# Altium PCB Sound&Light IC evaluation board.PcbDoc
Units mm, origin at the board's own origin, x right, y up, seen from the top; angles counter-clockwise.
Board outline 33.4 x 32.51 mm, 2 copper layers (Top Layer, Bottom Layer); 16 components, 25 nets, 74 pads, 9 vias.
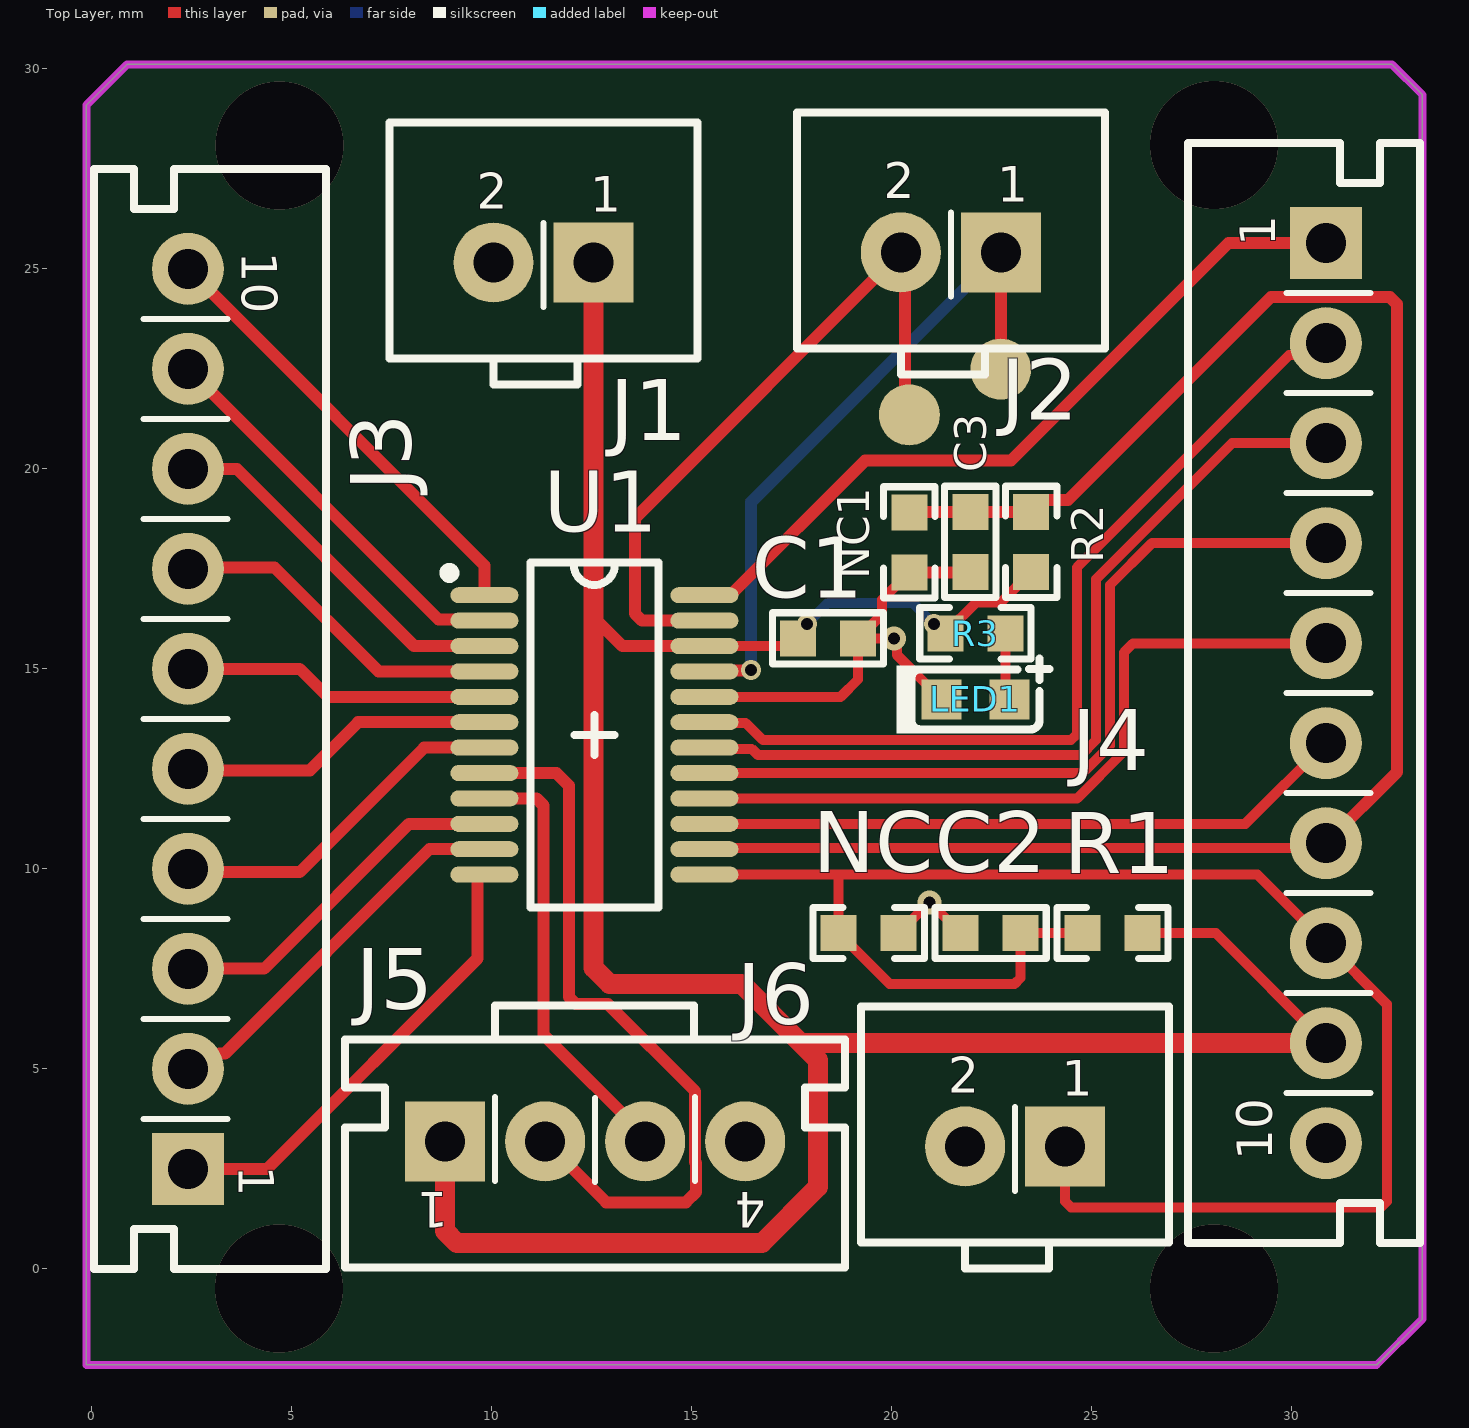
[diagram p0: Top Layer view]
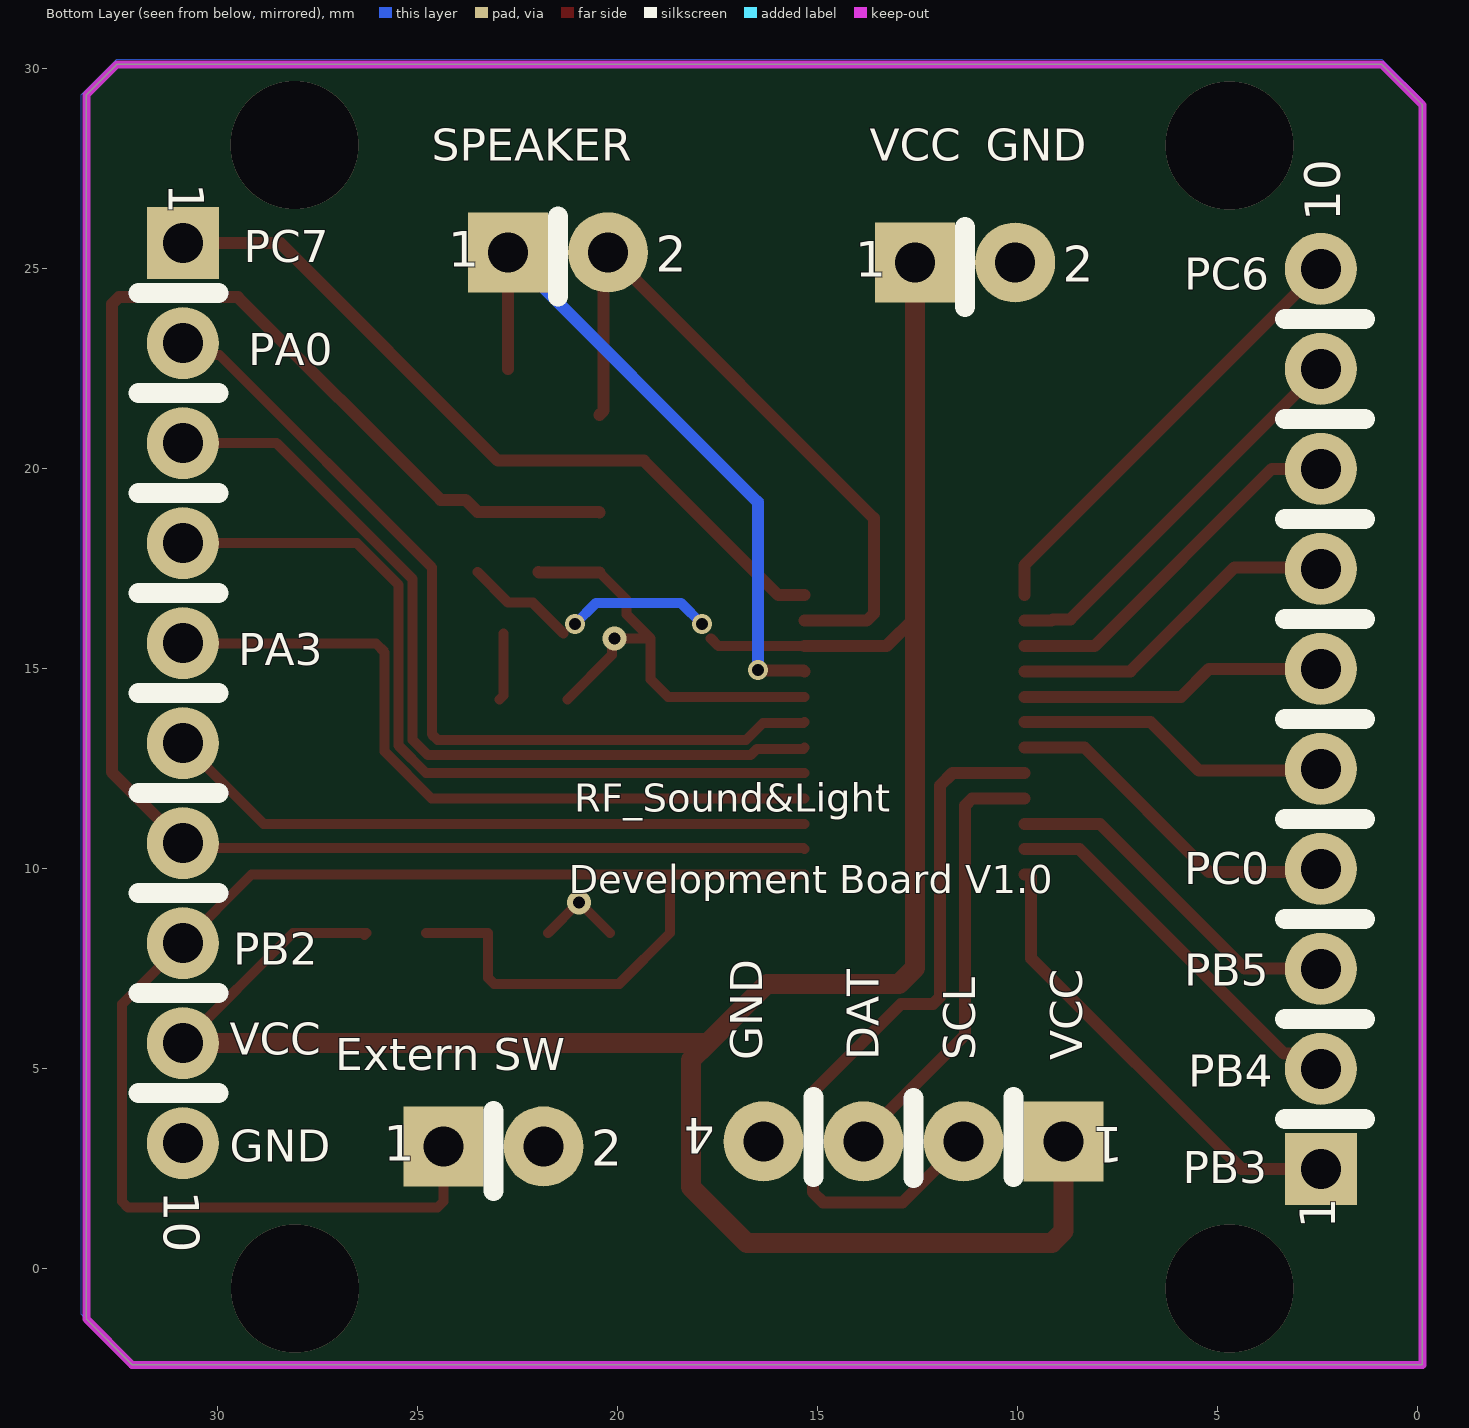
[diagram p1: Bottom Layer view, seen from below]
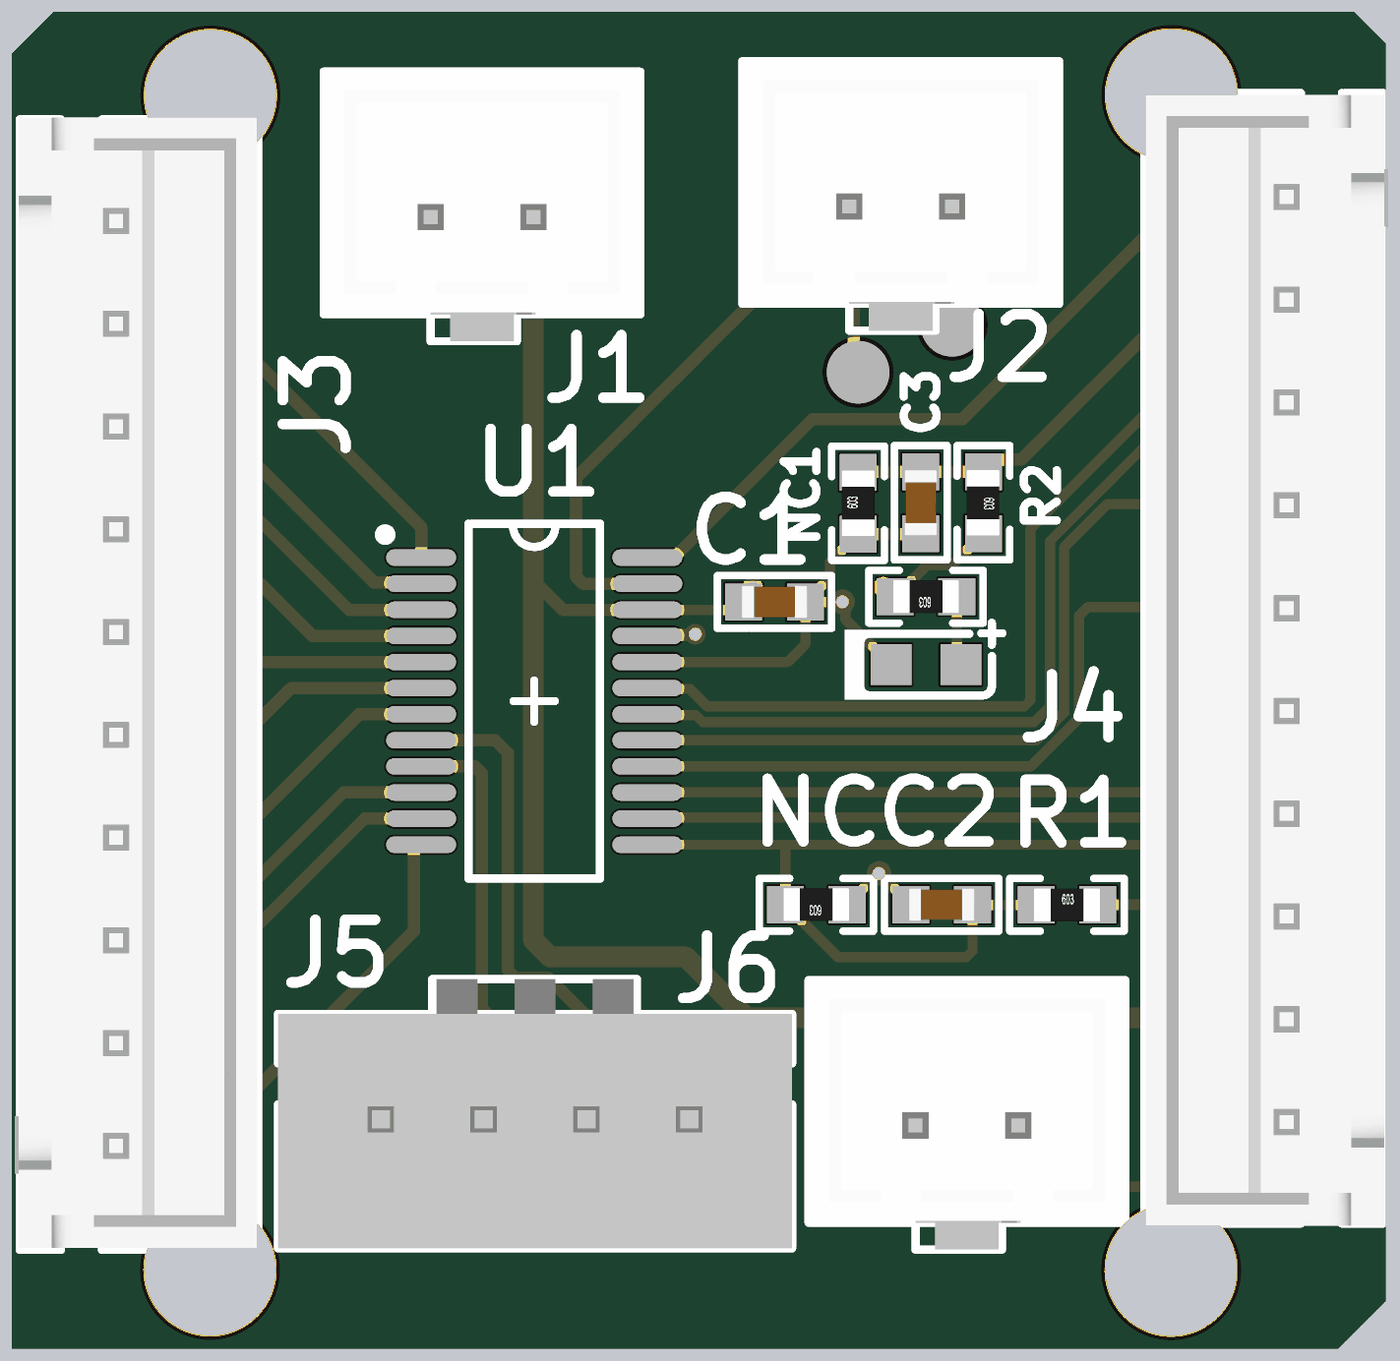
[diagram p2: 3D render of the assembled board from above, using the file's embedded part models]

## Layer stack, top to bottom
Top Solder: solder mask 0.0102, Solder Resist, Dk 3.5
Top Layer: signal copper 0.0356
Dielectric 1: dielectric 0.32, FR-4, Dk 4.8
Bottom Layer: signal copper 0.0356
Bottom Solder: solder mask 0.0102, Solder Resist, Dk 3.5

## Board outline
-0.127,-2.413 32.131,-2.413 33.274,-1.27 33.274,29.337 32.512,30.099 0.889,30.099 -0.127,29.083

## Design rules (kind name [scope] priority, off if disabled: settings)
Clearance [All] p1: gap=0.1 ignorepadtopadclearanceinfootprint=FALSE
PolygonConnect [All] p1: connectstyle=Direct reliefconductorwidth=0.254 reliefentries=4 polygonreliefangle="90 Angle" airgapwidth=0.254
RoutingVias [All] p1: holewidth=0.711 width=1.27 viastyle="Through Hole" minholewidth=0.711 minwidth=1.27 maxholewidth=0.711 maxwidth=1.27
SolderMaskExpansion [All] p1: expansion=0.102 istentingtop=FALSE
Width [All] p1: maxlimit=1 minlimit=0.1 preferedwidth=0.254
30 further rules are at their usual default settings.

## Components (designator, comment, footprint, x,y, rotation, side; value= is the part's Value field where it differs from the comment)
C1 "T542021036508" CAPC0603-RW 18.415,15.748 r180 top value=104
C2 "T542021036508" CAPC0603-RW 22.479,8.382 r0 top value=0.1u
C3 "T542021036508" CAPC0603-RW 21.971,18.161 r90 top value=0.1u
J1 "T690300125300" "CONN 2P PH=2.5mm HAA250A-2 WHITE" 11.303,25.146 r0 top value=2.5mm
J2 "T690300125300" "CONN 2P PH=2.5mm HAA250A-2 WHITE" 21.483,25.4 r0 top value=2.5mm
J3 "T690300105400" "CONN 10P PH=2.5mm ST CI2210P1VK0-NH" 2.413,13.736 r270 top value=2.5mm
J4 "T690300105400" "CONN 10P PH=2.5mm ST CI2210P1VK0-NH" 30.861,14.378 r90 top value=2.5mm
J5 "T690300127400" "CONN 4P PH=2.5mm XHB-4A-KL" 12.593,3.175 r180 top value=2.5mm
J6 "T690300125300" "CONN 2P PH=2.5mm HAA250A-2 WHITE" 23.094,3.048 r0 top value=2.5mm
LED1 "T575011480204" LED0603_BLUE 22.098,14.224 r0 top
NC "T502294202399" 0603-RW 19.431,8.382 r180 top value=9.1K
NC1 "T502294202399" 0603-RW 20.447,18.149 r90 top value=9.1K
R1 "T502294202399" 0603-RW 25.527,8.382 r0 top value=9.1K
R2 "T502294202399" 0603-RW 23.495,18.161 r270 top value=9.1K
R3 "T502294202399" 0603-RW 22.098,15.875 r180 top value=9.1K
U1 "BS86C08C 24SSOP" SSOP24(150mil) 12.573,13.335 r270 top

## Footprints (in the part's own frame and the unit in brackets; to place one, negate y for a bottom-side part, rotate by r counter-clockwise, add the part's x,y. Pads: shape width x height; smd on the part's side, far side on the other; paste and mask are expansions set on the pad)
0603-RW [mm]
  rect 0.9x0.9 smd mask+0.05: 1(-0.75,0) 2(0.75,0)
  silkscreen extent -1.39,-0.64 1.39,0.64, body extent -0.8,-0.41 0.8,0.39, height 0.3
CAPC0603-RW [mm] "Body size:  L1.6XW0.8XT0.8mm"
  rect 0.9x0.9 smd mask+0.05: 1(-0.75,0) 2(0.75,0)
  silkscreen extent -1.39,-0.64 1.39,0.64, body extent -0.8,-0.4 0.8,0.4, height 0.8
"CONN 2P PH=2.5mm HAA250A-2 WHITE" [mm] "CONN 2P PH=2.5mm HAA250A-2 WHITE"
  rect 2x2 hole 1: 1(1.25,0)
  round 2 hole 1: 2(-1.25,0)
  silkscreen extent -3.85,-3.05 3.85,3.5, body extent -3.75,-3.05 3.75,3.5, height 7.4
"CONN 4P PH=2.5mm XHB-4A-KL" [mm] "CONN 4P PH=2.5mm XHB-4A-KL H7.2mm"
  rect 2x2 hole 1: 1(3.75,0)
  round 2 hole 1: 2(1.25,0) 3(-1.25,0) 4(-3.75,0)
  silkscreen extent -6.25,-3.4 6.25,3.15, body extent -6.25,-3.4 6.25,3.15, height 7.2
"CONN 10P PH=2.5mm ST CI2210P1VK0-NH" [mm] "CONN 10P PH=2.5mm CI2210P1VK0-NH H7mm"
  rect 1.8x1.8 hole 1: 1(11.25,0)
  round 1.8 hole 1: 2(8.75,0) 3(6.25,0) 4(3.75,0) 5(1.25,0) 6(-1.25,0) 7(-3.75,0) 8(-6.25,0) 9(-8.75,0) 10(-11.25,0)
  silkscreen extent -13.75,-2.35 13.75,3.45, body extent -13.8,-2.47 13.7,3.43, height 7
LED0603_BLUE [mm] "1.6mmx0.8mm SMT LED, 0.45mm max. thickness"
  rect 1x1 smd paste+0 mask+0.05: 1(0.85,0) 2(-0.85,0)
  silkscreen extent -1.97,-0.85 1.85,1.02, body extent -0.8,-0.4 0.8,0.4, height 0.45
SSOP24(150mil) [mm] "SSOP-B(P=0.635mm) 24P"
  oval 0.4x1.7 smd mask+0.05: 1(-3.492,-2.75) 2(-2.857,-2.75) 3(-2.222,-2.75) 4(-1.587,-2.75) 5(-0.952,-2.75) 6(-0.317,-2.75) 7(0.318,-2.75) 8(0.953,-2.75) 9(1.588,-2.75) 10(2.223,-2.75) 11(2.858,-2.75) 12(3.493,-2.75) 13(3.492,2.75) 14(2.857,2.75) 15(2.222,2.75) 16(1.587,2.75) 17(0.952,2.75) 18(0.317,2.75) 19(-0.318,2.75) 20(-0.953,2.75) 21(-1.588,2.75) 22(-2.223,2.75) 23(-2.858,2.75) 24(-3.493,2.75)
  silkscreen extent -4.31,-3.75 4.32,1.6, body extent -4.31,-3 4.32,3, height 1.75

## Part data
C1 C2 C3: library part "CAP0603 0.01uF 50V 5%_X7R_WALSIN", "CAP X7R .01UF 50V +-5% 0603 WALSIN L", PACKAGE=CAPC0603, Tolerance=5%, Voltage=16v, CREATE_NAME=Nathan, CREATE_TIME=13-July-2016, Customer Specific=N/A, DIP&SMD=SMD, MFG=WALSIN, Other=X7R, SAP=T542021036508, Type=Capacitor
J1 J2 J6: library part "CONN 2P PH=2.5mm HAA250A-2 BLACK", "CONNECTOR HA2.5 2PIN BLACK K", Current=3A, CREATE_NAME=Nathan, CREATE_TIME=24-Nov-2017, DIP&SMD=DIP, MFG=金瑞康, MFG Part="HAA250A-2 BLACK", SAP=T690300125300, Type=Connector
J3 J4: library part "CONN 10P PH=2.5mm ST CI2210P1VK0-NH", "WTB CONN. 2.5MM 10PIN CI2210P1VK0-NH CV G", CREATE_NAME=Nathan, CREATE_TIME=21-Mar-2017, DIP&SMD=DIP, MFG=CVILUX, MFG Part=CI2210P1VK0-NH, SAP=T690300105400, Type=Connector
J5: library part "CONN 4P PH=2.5mm XHB-4A-KL", "CONNECTOR 4PIN P 2.54MM 180° K", CREATE_NAME=Nathan, CREATE_TIME=14-DEC-2017, DIP&SMD=DIP, MFG=金佳, MFG Part=XHB-4A-KL, SAP=T690300127400, Type=Connector
LED1: library part LED0603B_LTST-C193TBKT-5A, "LED 465 0603 LTST-C193TBK LITEON ( L", Color=BLUE, PACKAGE=0603, CREATE_NAME=Nathan, CREATE_TIME=28-Feb-2019, DIP&SMD=SMD, Lens Type="WALTER CLEAR", MFG="LITEON (光寶)", MFG Part=LTST-C193TBKT-5A, SAP=T575011480204, Type=LED
NC NC1 R1 R2 R3: library part "RES0603 1/10W +-0.1% 29.4K OHM 100PPM", "CHIP 29.4K OHM 100PPM +-1% 0603 WALS L", PACKAGE=0603, Power=1/10W, CREATE_NAME=Tom, CREATE_TIME=14-Sep-2016, Customer Specific=N/A, DIP&SMD=SMD, MFG=WALSIN, MFG Part=WR06X2942FTL, SAP=T502294202399, TOL=+-0.1%, Type=Resistor
U1: "BS86C08C_24SSOP", CREATE_NAME=Nathan, CREATE_TIME=16-Sep-2020, Customer Specific=N/A, DIP&SMD=SMD, MFG=HOLTEK, MFG Part=TRSF12167, Type=IC

## Free pads (board coordinates)
  round 1.524 smd: 2(20.447,21.336) 2(22.733,22.479)

## Via types
v1: diameter 3.2, hole 3.2, Top Layer to Bottom Layer, 4 vias
v2: diameter 0.5, hole 0.3, Top Layer to Bottom Layer, tented both sides, 3 vias
v3: diameter 0.6, hole 0.3, Top Layer to Bottom Layer, tented both sides, 2 vias

## Nets (pads, with @x,y where several pads share a name; then routed paths per layer and width w, separated by ;. In a path a pad name is that pad's centre, name@x,y a point inside that pad or via, vN(x,y) a via of type N, cw(c..) or ccw(c..) an arc to the next point about the centre after c; other vN are vias at no path point)
DAT: J5.3 U1.9 | length 11
  Top Layer w0.3: U1.9 11.127,11.747 11.303,11.572 11.303,5.842 13.843,3.302 J5.3
GND: C1.1 C2.1 C3.1 J1.2 J4.10 J5.4 J6.2 LED1.2 NC1.1 NC.1 U1.20 | length 13.9
  Top Layer w0.25: U1.20 18.732,14.287 19.165,14.72 C1.1 ; NC.1 20.943,9.144 v3(20.955,9.144) 20.967,9.144 C2.1 ; NC1.1 19.768,16.72 19.768,16.351 C1.1 ; LED1.2 20.133,15.339 20.133,15.681 v3(20.066,15.748) C1.1
  Top Layer w0.3: NC1.1 21.959,17.399 C3.1
NetC2_2: C2.2 J4.8 J6.1 NC.2 R1.1 U1.13 | length 42.1
  Top Layer w0.25: U1.13 18.669,9.842 ; J6.1 24.344,1.673 24.493,1.524 32.239,1.524 32.385,1.67 32.385,6.604 J4.8 29.146,9.842 18.669,9.842 ; R1.1 C2.2 23.229,7.258 23.083,7.112 19.951,7.112 NC.2 18.681,9.831 18.669,9.842
NetJ3_1: J3.1 U1.12 | length 11.7
  Top Layer w0.3: J3.1 4.391,2.486 9.652,7.747 9.652,9.796 9.698,9.842 U1.12
NetJ3_2: J3.2 U1.11 | length 9.7
  Top Layer w0.3: J3.2 2.819,4.986 3.203,5.37 3.338,5.37 8.445,10.477 U1.11
NetJ3_3: J3.3 U1.10 | length 8.9
  Top Layer w0.3: J3.3 2.42,7.493 4.318,7.493 7.937,11.112 U1.10
NetJ3_4: J3.4 U1.7 | length 8.7
  Top Layer w0.3: J3.4 2.493,9.906 5.207,9.906 8.318,13.017 U1.7
NetJ3_5: J3.5 U1.6 | length 7.9
  Top Layer w0.3: J3.5 2.453,12.446 5.461,12.446 6.667,13.652 U1.6
NetJ3_6: J3.6 U1.5 | length 7.7
  Top Layer w0.3: J3.6 5.207,14.986 5.906,14.287 U1.5
NetJ3_7: J3.7 U1.4 | length 8.5
  Top Layer w0.3: J3.7 2.453,17.526 4.572,17.526 7.176,14.922 U1.4
NetJ3_8: J3.8 U1.3 | length 9.2
  Top Layer w0.3: J3.8 3.636,19.986 8.065,15.557 U1.3
NetJ3_9: J3.9 U1.2 | length 10
  Top Layer w0.3: J3.9 8.675,16.224 9.114,16.224 9.146,16.192 U1.2
NetJ3_10: J3.10 U1.1 | length 11.2
  Top Layer w0.3: J3.10 9.823,17.576 U1.1
NetJ4_1: J4.1 U1.24 | length 19.2
  Top Layer w0.3: U1.24 15.973,16.828 19.339,20.193 22.987,20.193 28.422,25.628 J4.1
NetJ4_2: J4.2 U1.19 | length 22.3
  Top Layer w0.25: U1.19 15.342,13.633 16.358,13.633 16.783,13.208 24.492,13.208 24.638,13.354 24.638,17.526 29.943,22.831 30.564,22.831 J4.2
NetJ4_3: J4.3 U1.18 | length 21.2
  Top Layer w0.25: U1.18 15.352,12.989 16.507,12.989 16.669,12.827 24.733,12.827 25.115,13.209 25.115,17.228 28.515,20.628 J4.3
NetJ4_4: J4.4 U1.17 | length 20.3
  Top Layer w0.25: U1.17 24.783,12.383 25.465,13.065 25.465,17.083 26.51,18.128 J4.4
NetJ4_5: J4.5 U1.16 | length 18.6
  Top Layer w0.25: U1.16 24.643,11.747 25.815,12.92 25.815,15.401 26.035,15.621 30.854,15.621 J4.5
NetJ4_6: J4.6 U1.15 | length 16.4
  Top Layer w0.25: U1.15 28.845,11.112 J4.6
NetLED1_1: LED1.1 R3.1 | length 1.7
  Top Layer w0.25: R3.1 22.848,14.324 LED1.1
PWMN: J2.1 pad.2@22.733,22.479 U1.21 | length 17.2
  Top Layer w0.3: U1.21 15.342,14.942 16.466,14.942 v2(16.488,14.964) v2@16.51,14.986 ; pad.2@22.733,22.479 J2.1
  Bottom Layer w0.3: v2(16.488,14.964) 16.488,19.155 J2.1
PWMP: J2.2 pad.2@20.447,21.336 U1.23 | length 17.7
  Top Layer w0.3: U1.23 13.765,16.192 13.589,16.368 13.589,18.756 J2.2 20.34,25.293 20.34,21.443 pad.2@20.447,21.336
SCL: J5.2 U1.8 | length 18.7
  Top Layer w0.3: U1.8 11.621,12.382 11.938,12.065 11.938,6.78 12.114,6.604 12.914,6.604 15.093,4.425 15.093,2.657 15.113,2.637 15.113,1.905 14.859,1.651 12.867,1.651 J5.2
SW: C3.2 J4.7 NC1.2 R2.1 U1.14 | length 44.3
  Top Layer w0.25: U1.14 15.352,10.506 30.739,10.506 J4.7
  Top Layer w0.3: NC1.2 20.459,18.911 C3.2 R2.1 23.795,19.211 24.418,19.211 29.485,24.278 32.463,24.278 32.639,24.102 32.639,12.406 J4.7
VCC: C1.2 J1.1 J4.9 J5.1 R1.2 R2.2 R3.2 U1.22 | length 70.4
  Top Layer w0.254: U1.22 17.474,15.557 C1.2 ; R3.2 22.116,16.643 22.727,16.643 R2.2 ; R1.2@26.324,8.335 R1.2 28.107,8.382 J4.9
  Top Layer w0.3: 12.553,16.276 13.271,15.557 U1.22
  Top Layer w0.5: J5.1 8.843,0.928 9.136,0.635 16.764,0.635 18.161,2.032 18.161,5.207 17.74,5.628 ; J1.1 12.553,16.276 12.553,7.513 12.954,7.112 16.256,7.112 17.74,5.628 ; J4.9 17.74,5.628
  Bottom Layer w0.254: v2(17.885,16.107) 18.415,16.637 20.53,16.637 v2(21.06,16.107)
copper on no net:
  other v1: 4.69,-0.501 28.06,-0.508 4.699,28.067 28.067,28.081

## Polygon pours and split planes (outlines as drawn)
GND on Bottom Layer "NONET_L02_P000" (solid, shelved, pour order 0): -0.127,29.083 -0.127,-2.413 32.131,-2.413 33.401,-1.143 33.401,29.337 32.512,30.226 0.889,30.226 0,29.337 -0.127,29.21

## Keep-outs
Keep-Out Layer:
  the board outline again, w0.2

## Silkscreen, mask and mechanical layers (free items; w line width, h text height)
Bottom Overlay:
  text "GND" at 10.795,27.686 h0.8
  text "VCC" at 13.685,27.688 h0.8
  text "SPEAKER" at 24.638,27.686 h0.8
  text "PC7" at 29.337,25.146 h0.8
  text "PC6" at 5.824,24.461 h0.8
  text "PA0" at 29.226,22.574 h0.8
  text "PA3" at 29.48,15.081 h0.8
  text "RF_Sound&Light" at 21.082,11.176 h1.2
  text "PC0" at 5.824,9.602 h0.8
  text "Development Board V1.0" at 21.209,9.144 h1.2
  text "PB2" at 29.607,7.588 h0.8
  text "PB5" at 5.824,7.062 h0.8
  text "VCC" at 29.687,5.336 h0.8
  text "VCC" at 8.382,5.207 h0.8 r270
  text "SCL" at 11.049,5.207 h0.8 r270
  text "DAT" at 13.462,5.207 h0.8 r270
  text "GND" at 16.383,5.207 h0.8 r270
  text "Extern SW" at 27.051,4.953 h0.8
  text "PB4" at 5.731,4.54 h0.8
  text "GND" at 29.687,2.669 h0.8
  text "PB3" at 5.858,2.127 h0.8

## Text inside footprints (layer, text, board x,y; h text height)
J1: Top Overlay "1" at 12.471,26.416 h0.89; Top Overlay "2" at 9.627,26.492 h0.89; Bottom Overlay "1" at 14.046,24.79 h0.89; Bottom Overlay "2" at 8.865,24.663 h0.89
J2: Top Overlay "1" at 22.651,26.67 h0.89; Top Overlay "2" at 19.807,26.746 h0.89; Bottom Overlay "1" at 24.226,25.044 h0.89; Bottom Overlay "2" at 19.045,24.917 h0.89
J3: Top Overlay "10" at 3.759,25.412 h0.89 r270; Top Overlay "1" at 3.683,2.568 h0.89 r270; Bottom Overlay "10" at 1.93,26.174 h0.89 r270; Bottom Overlay "1" at 2.057,0.993 h0.89 r270
J4: Top Overlay "10" at 29.515,2.702 h0.89 r90; Top Overlay "1" at 29.591,25.546 h0.89 r90; Bottom Overlay "10" at 31.344,1.94 h0.89 r90; Bottom Overlay "1" at 31.217,27.121 h0.89 r90
J5: Top Overlay "4" at 16.86,1.905 h0.89 r180; Top Overlay "1" at 8.925,1.905 h0.89 r180; Bottom Overlay "4" at 17.568,3.75 h0.89 r180; Bottom Overlay "1" at 7.35,3.531 h0.89 r180
J6: Top Overlay "1" at 24.262,4.318 h0.89; Top Overlay "2" at 21.418,4.394 h0.89; Bottom Overlay "1" at 25.837,2.692 h0.89; Bottom Overlay "2" at 20.656,2.565 h0.89